# Altium PCB EtherWiz3K4KNic.PcbDoc (part 1 of 2)
Units mm, origin at the board's own origin, x right, y up, seen from the top; angles counter-clockwise.
Board outline 99.29 x 46.58 mm, 4 copper layers (Top Layer, GND, 5V, Bottom Layer), stack 1.582 mm thick; 69 components, 129 nets, 421 pads, 204 vias.
Unrouted connection lines stored in the file: 3.
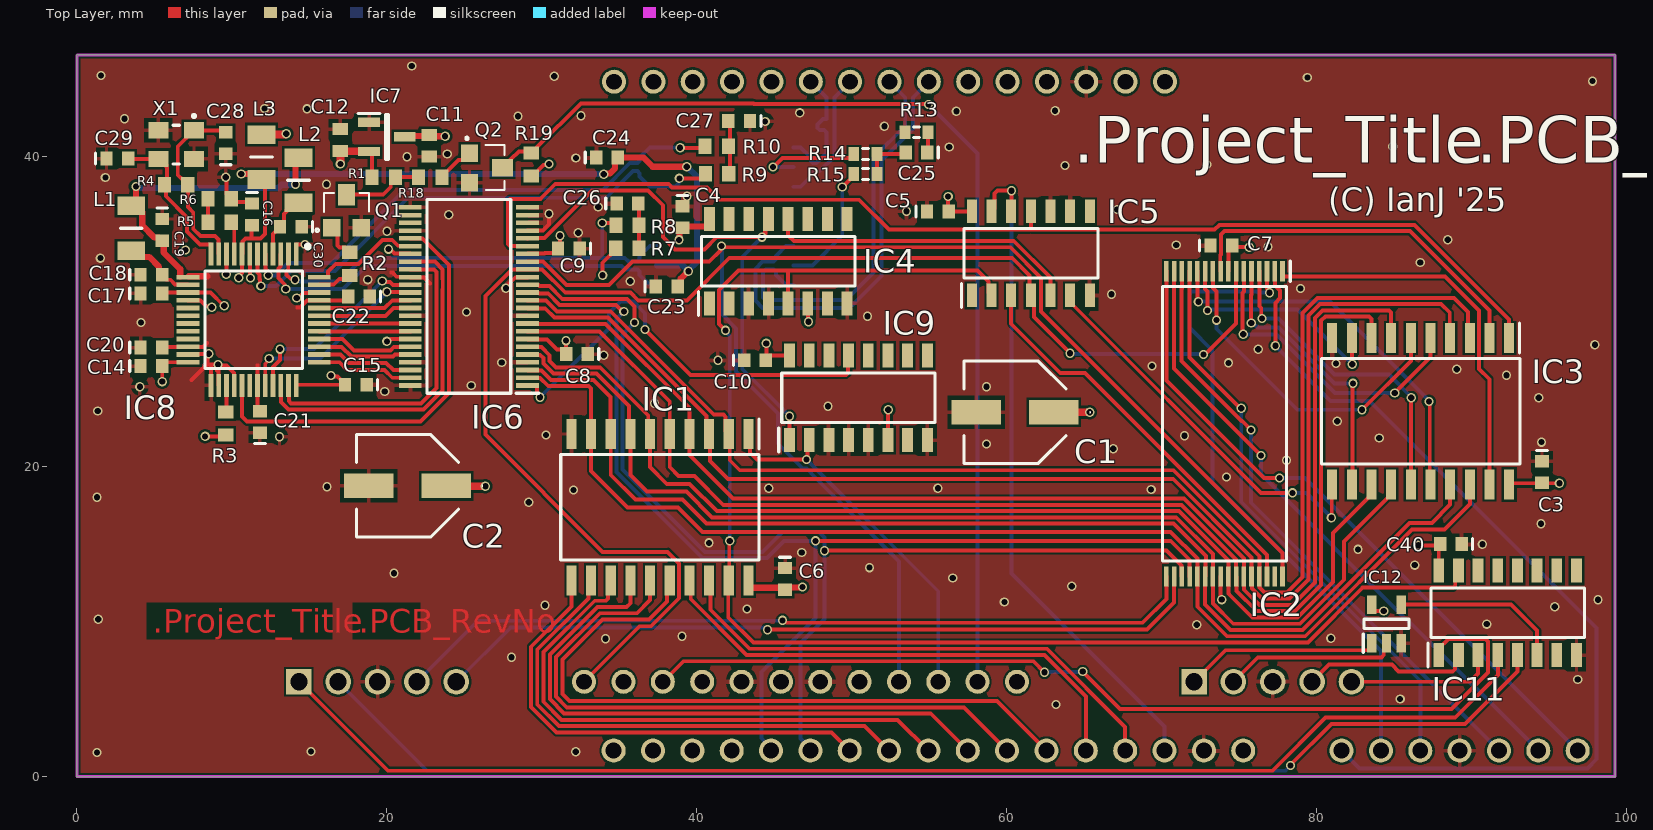
[diagram p0: Top Layer view]
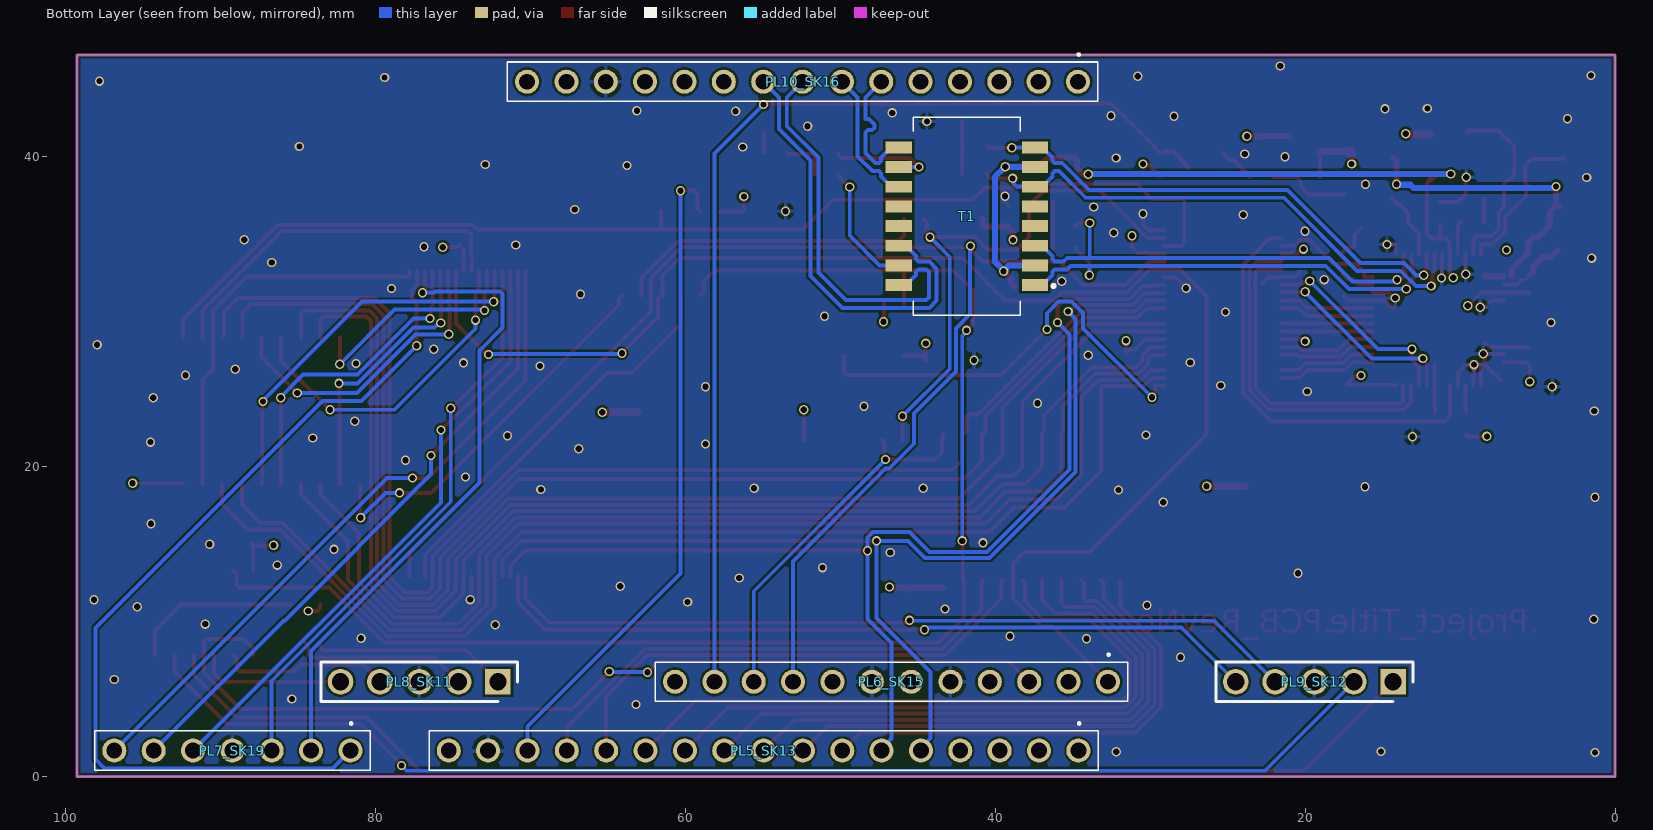
[diagram p1: Bottom Layer view, seen from below]
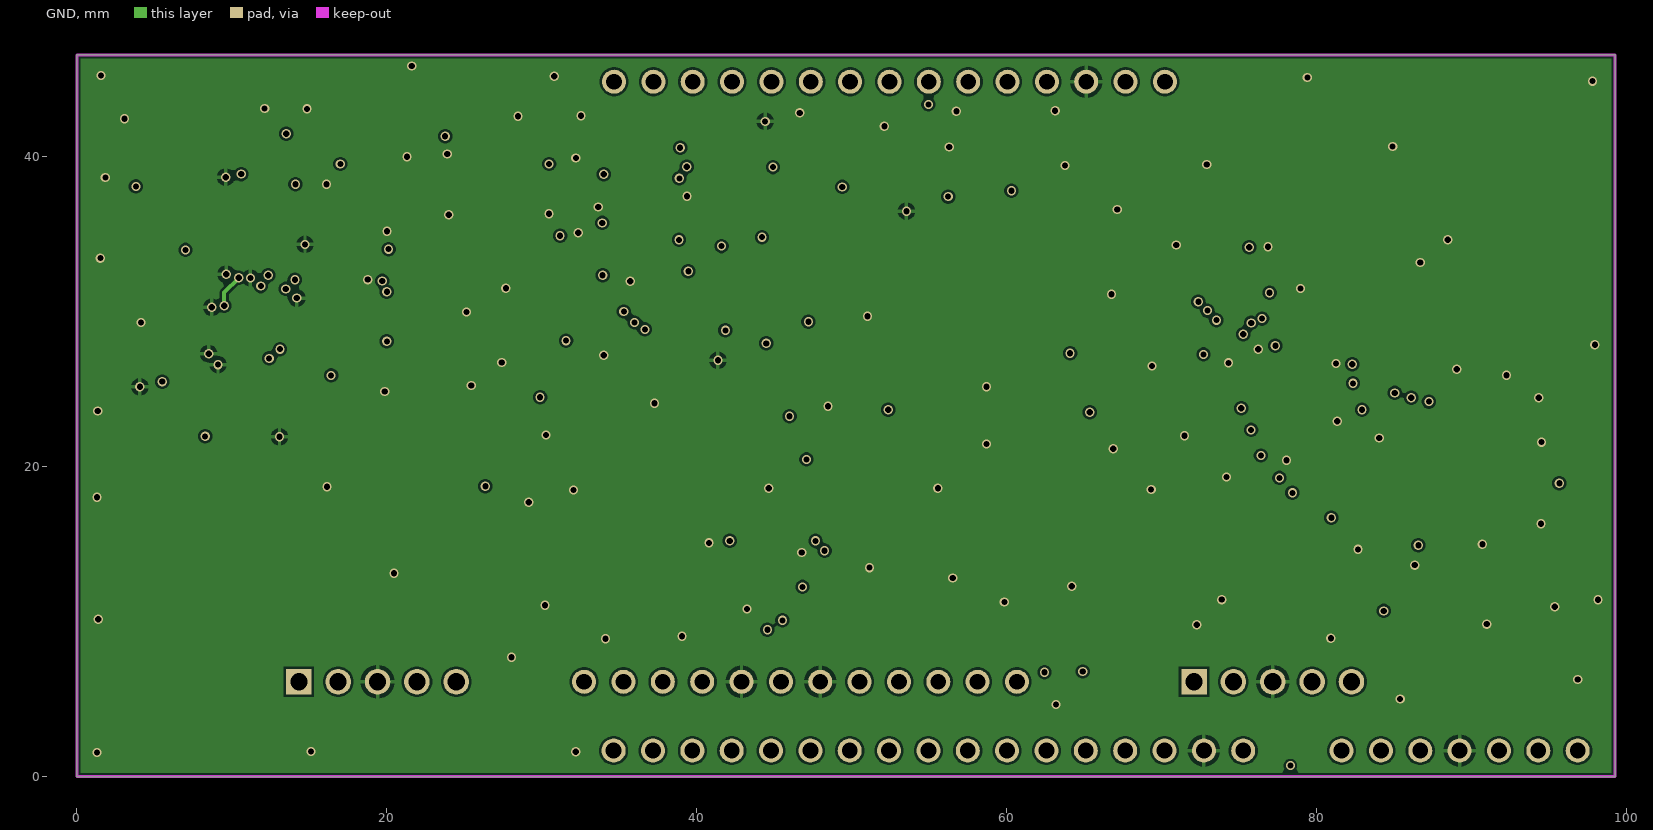
[diagram p2: GND]
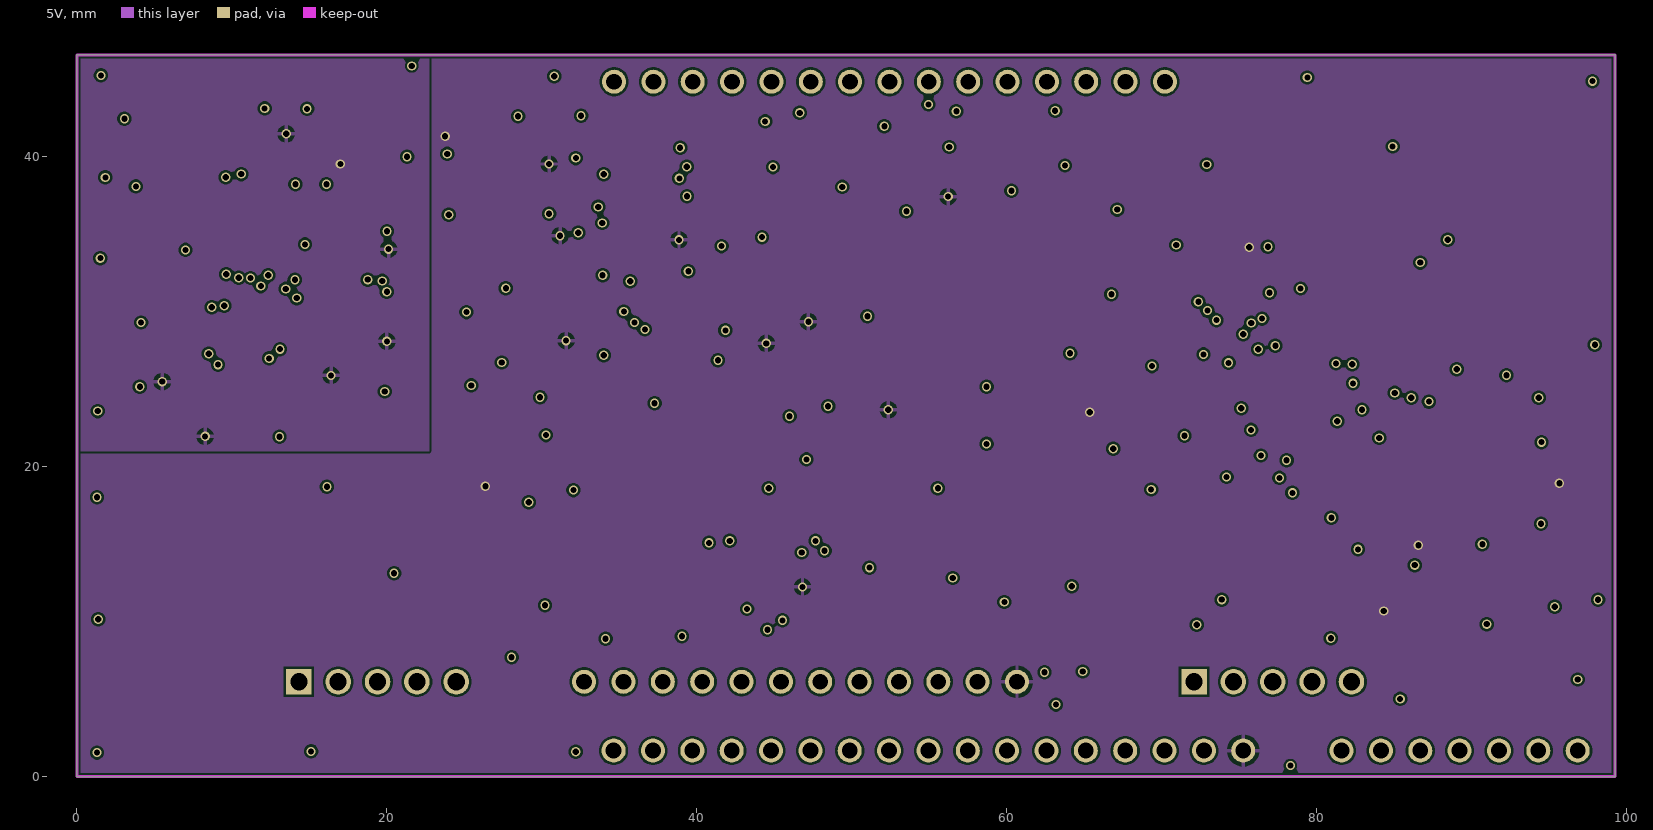
[diagram p3: 5V]
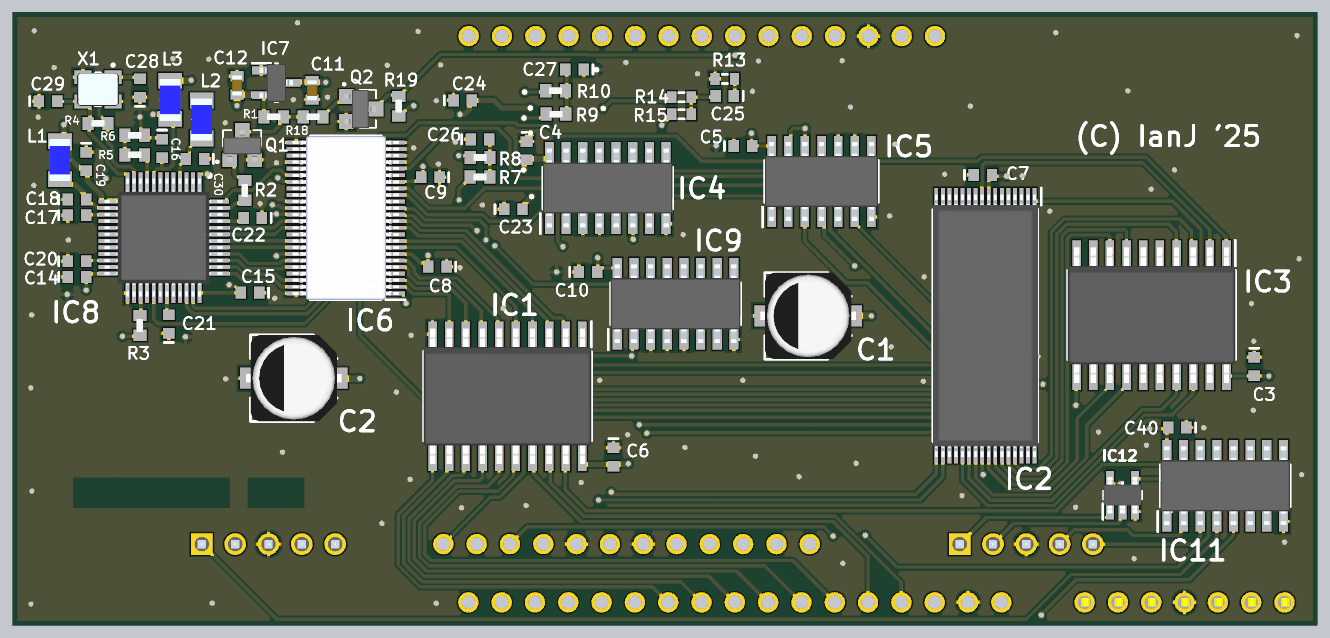
[diagram p5: 3D render of the assembled board from above, using the file's embedded part models]
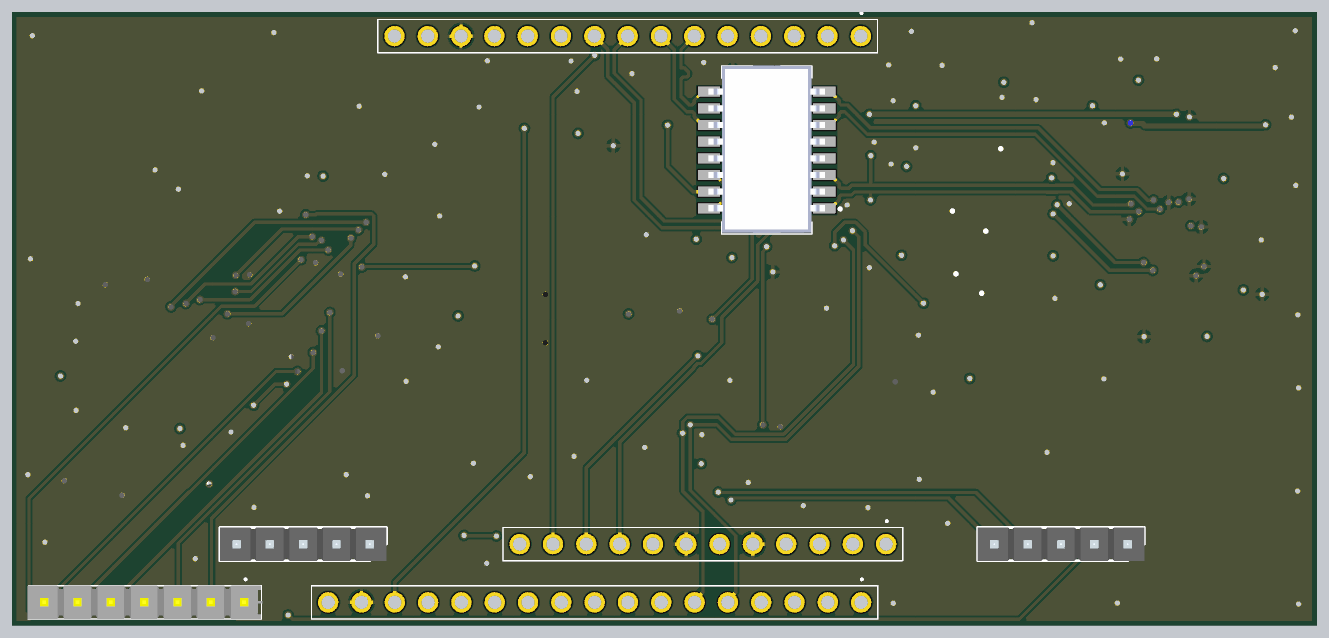
[diagram p6: 3D render of the assembled board from below, using the file's embedded part models]

## Layer stack, top to bottom
Top Solder: solder mask 0.0102, Solder Resist, Dk 3.5
Top Layer: signal copper 0.0356
Dielectric 1: prepreg 0.0711, PP-006, Dk 4.1
GND: signal copper 0.035
Dielectric 2: prepreg 1.05, PP-006, Dk 4.1
5V: signal copper 0.035
Dielectric2: dielectric 0.32, FR-4, Dk 4.8
Bottom Layer: signal copper 0.0356
Bottom Solder: solder mask 0.0102, Solder Resist, Dk 3.5

## Board outline
0,0 99.289,0 99.289,46.584 0,46.584

## Design rules (kind name [scope] priority, off if disabled: settings)
Clearance [All] p1: gap=0.15 ignorepadtopadclearanceinfootprint=FALSE
DiffPairsRouting [All] p1: maxlimit=0.254 minlimit=0.254 mostfreqgap=0.254 toplayer_minwidth=0.254 toplayer_maxwidth=0.381 toplayer_prefwidth=0.254 midlayer1_minwidth=0.254 midlayer1_maxwidth=0.381 midlayer1_prefwidth=0.254 midlayer2_minwidth=0.254 midlayer2_maxwidth=0.381 midlayer2_prefwidth=0.254 bottomlayer_minwidth=0.254 bottomlayer_maxwidth=0.381 bottomlayer_prefwidth=0.254 maxuncoupledlength=12.7
PolygonConnect [All] p1: connectstyle=Relief reliefconductorwidth=0.254 reliefentries=4 polygonreliefangle="90 Angle" airgapwidth=0.254
RoutingVias [All] p1: holewidth=0.711 width=1.27 viastyle="Through Hole" minholewidth=0.711 minwidth=1.27 maxholewidth=0.711 maxwidth=1.27
SolderMaskExpansion [All] p1: expansion=0.102 istentingtop=FALSE
SupplyNets "Schematic Supply Nets_3" [InNet('GND')] p1: voltage=0.000
SupplyNets "Schematic Supply Nets_9" [InNet('12V')] p2: voltage=0.000
SupplyNets "Schematic Supply Nets_8" [InNet('1v2d')] p3: voltage=0.000
SupplyNets "Schematic Supply Nets_7" [InNet('3v3a')] p4: voltage=0.000
SupplyNets "Schematic Supply Nets_6" [InNet('-5V')] p5: voltage=0.000
SupplyNets "Schematic Supply Nets_5" [InNet('1v2o')] p6: voltage=0.000
SupplyNets "Schematic Supply Nets_4" [InNet('GND_CHASS')] p7: voltage=0.000
SupplyNets "Schematic Supply Nets_2" [InNet('1v2a')] p8: voltage=0.000
SupplyNets "Schematic Supply Nets_1" [InNet('3v3')] p9: voltage=0.000
SupplyNets "Schematic Supply Nets" [InNet('5V')] p10: voltage=0.000
Width [All] p1: maxlimit=0.254 minlimit=0.254 preferedwidth=0.254
29 further rules are at their usual default settings.

## Classes and differential pairs
component class EtherWiz_Sockets: C40 IC11 IC12 PL1 PL2 PL3 PL4 PL5_SK13 PL6_SK15 PL7_SK19 PL8_SK11 PL9_SK12 PL10_SK16
component class EtherWiz: C1 C2 C3 C4 C5 C6 C7 C8 C9 C10 C11 C12 C14 C15 C16 C17 C18 C19 C20 C21 C22 C23 C24 C25 C26 C27 C28 C29 C30 IC1 IC2 IC3 IC4 IC5 IC6 IC7 IC8 IC9 L1 L2 L3 Q1 Q2 R1 R2 R3 R4 R5 R6 R7 R8 R9 R10 R13 R14 R15 R18 R19 T1 X1
differential pair TX: +TX_P -TX_N
differential pair RX: +RX_P -RX_N
differential pair ETX: +ETX_P -ETX_N
differential pair ERX: +ERX_P -ERX_N

## Components (designator, comment, footprint, x,y, rotation, side; value= is the part's Value field where it differs from the comment)
C1 "EEE-HA1C470AP" EEE1AA101SP 60.554,23.52 r180 top
C2 "EEE-HA1C470AP" EEE1AA101SP 21.336,18.771 r180 top
C3 "100n" CAPC1608L 94.575,19.659 r270 top
C4 "100n" CAPC1608L 39.091,36.119 r270 top
C5 "100n" CAPC1608L 55.575,36.474 r0 top
C6 "100n" CAPC1608L 45.712,12.762 r270 top
C7 "100n" CAPC1608L 73.875,34.274 r0 top
C8 "100n" CAPC1608L 32.283,27.28 r180 top
C9 "100n" CAPC1608L 31.75,34.087 r180 top
C10 "100n" CAPC1608L 43.775,26.874 r0 top
C11 "1uF" CAPC1608X90N 22.734,40.724 r90 top
C12 "1uF" CAPC1608X90N 17.006,41.094 r270 top
C14 "100n" CAPC1608L 4.806,26.494 r0 top
C15 "100n" CAPC1608L 18.006,25.294 r180 top
C16 "100n" CAPC1608L 11.306,36.294 r270 top
C17 "100n" CAPC1608L 4.806,31.194 r0 top
C18 "100nF" CAPC1608L 4.806,32.394 r0 top
C19 "100nF" CAPC1608L 5.506,35.294 r270 top
C20 "100nF" CAPC1608L 4.806,27.694 r0 top
C21 "100nF" CAPC1608L 11.806,22.894 r90 top
C22 "100nF" CAPC1608L 18.206,30.994 r180 top
C23 "100nF" CAPC1608L 38.075,31.648 r0 top
C24 "100nF" CAPC1608L 34.214,39.954 r0 top
C25 "1nF" CAPC1608L 54.198,40.292 r180 top
C26 "100nF" CAPC1608L 35.535,36.982 r0 top
C27 "100nF" CAPC1608L 42.748,42.316 r180 top
C28 "24pF" CAPC1608L 9.606,40.894 r90 top
C29 "24pF" CAPC1608L 2.606,39.894 r0 top
C30 "100nF" CAPC1608L 13.806,35.494 r180 top
C40 "100n" CAPC1608L 88.697,15.011 r180 top
IC1 "SN74HCT245DWR" SOIC127P1030X265-20N 37.633,17.388 r270 top
IC2 "MX29F040CTI-70G" SOP50P2000X120-32N 74.075,22.774 r270 top locked
IC3 "SN74HCT273DWR" SOIC127P1030X265-20N 86.74,23.584 r270 top locked
IC4 "74HCT138D,653" SOIC127P600X175-16N 45.275,33.274 r90 top locked
IC5 "74HCT32D" SOIC127P600X175-14N 61.575,33.774 r90 top locked
IC6 "74ALVC164245DGG_11" SOP50P810X120-48N 25.306,30.994 r180 top
IC7 "MCP1703AT-3302E_CB" SOT95P255X145-3N 20.006,41.294 r0 top
IC8 "W6100L" QFP50P900X900X160-48N 11.406,29.494 r270 top
IC9 "CD74HCT238M96" SOIC127P600X175-16N 50.45,24.449 r90 top locked
IC11 "74HCT138D,653" SOIC127P600X175-16N 92.354,10.566 r90 top
IC12 "SN74LVC1G08QDBVRQ1" SOT95P280X145-5N 84.531,9.855 r90 top
L1 "782763800" INDC3216X130N 3.506,35.394 r90 top
L2 "782763800" INDC3216X130N 14.306,38.494 r270 top
L3 "782763800" INDC3216X130N 11.906,39.994 r270 top
PL5_SK13 "EW-17-12-G-S-550" TSW-117-XX-YY-S 34.646,1.676 r0 bottom locked
PL6_SK15 "TSW-112-05-G-S" TSW-112-XX-YY-S 32.741,6.121 r0 bottom locked
PL7_SK19 "TSW-107-05-G-S" TSW-107-XX-YY-S 81.636,1.676 r0 bottom locked
PL8_SK11 "TSW-105-05-G-S-LL" HDRV5W64P0X254_1X5_1270X254X521P 72.111,6.121 r180 bottom locked
PL9_SK12 "TSW-105-05-G-S-LL" HDRV5W64P0X254_1X5_1270X254X521P 14.326,6.121 r180 bottom locked
PL10_SK16 "TSW-115-05-G-S" TSW-115-XX-YY-S 34.671,44.856 r0 bottom locked
Q1 "BC846" SOT-23 17.406,36.494 r0 top
Q2 "BC846" SOT-23 26.406,39.294 r270 top
R1 "100K" RESC1608X50N 19.806,38.694 r180 top
R2 "2K2" RESC1608X50N 17.606,33.094 r90 top
R3 "2K2" RESC1608X50N 9.606,22.794 r270 top
R4 "1M" RESC1608X50N 6.406,38.194 r0 top
R5 "12K" RESC1608X50N 9.206,35.794 r0 top
R6 "300R" RESC1608X50N 9.206,37.294 r180 top
R7 "50R" RESC1608X50N 35.535,34.112 r180 top
R8 "50R" RESC1608X50N 35.539,35.598 r180 top
R9 "50R" RESC1608X50N 41.326,38.913 r180 top
R10 "50R" RESC1608X50N 41.3,40.691 r180 top
R13 "0R" RESC1608L 54.198,41.592 r0 top
R14 "75R" RESC1608L 50.898,40.192 r180 top
R15 "75R" RESC1608L 50.898,38.892 r180 top
R18 "2K2" RESC1608X50N 22.806,38.694 r0 top
R19 "100K" RESC1608X50N 29.335,39.512 r270 top
T1 "PT61017PEL" PT61017PEL 41.199,36.17 r90 bottom locked
X1 "25MHz" ABM810000MHZ12D2W 6.406,40.794 r180 top

## Footprints (in the part's own frame and the unit in brackets; to place one, negate y for a bottom-side part, rotate by r counter-clockwise, add the part's x,y. Pads: shape width x height; smd on the part's side, far side on the other; paste and mask are expansions set on the pad)
ABM810000MHZ12D2W [mm]
  rect 1.3x1.05 smd: 1(-1.15,-0.925) 2(1.15,-0.925) 3(1.15,0.925) 4(-1.15,0.925)
  silkscreen extent -1.25,-1.95 0.2,1.25, body extent -1.6,-1.25 1.6,1.25, height 0.8
CAPC1608L [mm] "Chip Capacitor, Body 1.6x0.8mm, IPC High Density"
  rect 0.8x0.9 smd: 1(-0.7,0) 2(0.7,0)
  silkscreen extent -1.4,-0.35 -1.4,0.35, body extent -0.87,-0.48 0.87,0.48, height 0.85
CAPC1608X90N [mm]
  rect 0.78x0.99 smd: 1(-0.7,0) 2(0.7,0)
  body extent -0.8,-0.41 0.8,0.41, height 0.9
EEE1AA101SP [mm]
  rect 3.2x1.6 smd: 1(-2.5,0) 2(2.5,0)
  silkscreen extent -4.88,-3.3 3.3,3.3, body extent 0,0 0,0
HDRV5W64P0X254_1X5_1270X254X521P [mm]
  rect 1.65x1.65 hole 1.1: 1(0,0)
  round 1.65 hole 1.1: 2(-2.54,0) 3(-5.08,0) 4(-7.62,0) 5(-10.16,0)
  silkscreen extent -11.43,-1.27 1.27,1.27, body extent -11.43,-1.27 1.27,1.27, height 5.21
INDC3216X130N [mm]
  rect 1.2x1.8 smd: 1(-1.45,0) 2(1.45,0)
  silkscreen extent 0,-0.7 0,0.7, body extent -1.6,-0.8 1.6,0.8, height 1.3
PT61017PEL [mm]
  rect 0.76x1.7 smd: 1(-4.445,-3.75) 2(-3.175,-3.75) 3(-1.905,-3.75) 4(-0.635,-3.75) 5(0.635,-3.75) 6(1.905,-3.75) 7(3.175,-3.75) 8(4.445,-3.75) 9(4.445,5.05) 10(3.175,5.05) 11(1.905,5.05) 12(0.635,5.05) 13(-0.635,5.05) 14(-1.905,5.05) 15(-3.175,5.05) 16(-4.445,5.05)
  silkscreen extent -6.4,-5.05 6.4,4.1, body extent -6.33,-3.8 6.45,5.1, height 5.14
QFP50P900X900X160-48N [mm]
  rect 1.475x0.3 smd: 1(-4.238,2.75) 2(-4.238,2.25) 3(-4.238,1.75) 4(-4.238,1.25) 5(-4.238,0.75) 6(-4.238,0.25) 7(-4.238,-0.25) 8(-4.238,-0.75) 9(-4.238,-1.25) 10(-4.238,-1.75) 11(-4.238,-2.25) 12(-4.238,-2.75) 25(4.238,-2.75) 26(4.238,-2.25) 27(4.238,-1.75) 28(4.238,-1.25) 29(4.238,-0.75) 30(4.238,-0.25) 31(4.238,0.25) 32(4.238,0.75) 33(4.238,1.25) 34(4.238,1.75) 35(4.238,2.25) 36(4.238,2.75)
  rect 0.3x1.475 smd: 13(-2.75,-4.238) 14(-2.25,-4.238) 15(-1.75,-4.238) 16(-1.25,-4.238) 17(-0.75,-4.238) 18(-0.25,-4.238) 19(0.25,-4.238) 20(0.75,-4.238) 21(1.25,-4.238) 22(1.75,-4.238) 23(2.25,-4.238) 24(2.75,-4.238) 37(2.75,4.238) 38(2.25,4.238) 39(1.75,4.238) 40(1.25,4.238) 41(0.75,4.238) 42(0.25,4.238) 43(-0.25,4.238) 44(-0.75,4.238) 45(-1.25,4.238) 46(-1.75,4.238) 47(-2.25,4.238) 48(-2.75,4.238)
  silkscreen extent -4.85,-3.15 3.15,3.63, body extent -4.5,-4.5 4.5,4.5, height 1.6
RESC1608L [mm] "Chip Resistor, Body 1.6x0.8mm, IPC High Density"
  rect 0.7x0.9 smd: 1(-0.75,0) 2(0.75,0)
  silkscreen extent -0.2,-0.35 0.2,0.35, body extent -0.8,-0.41 0.8,0.41, height 0.45
RESC1608X50N [mm]
  rect 0.85x1 smd: 1(-0.75,0) 2(0.75,0)
  body extent -0.5,-0.25 0.5,0.25, height 0.35
SOIC127P600X175-14N [mm]
  rect 1.525x0.65 smd: 1(-2.712,3.81) 2(-2.712,2.54) 3(-2.712,1.27) 4(-2.712,0) 5(-2.712,-1.27) 6(-2.712,-2.54) 7(-2.712,-3.81) 8(2.712,-3.81) 9(2.712,-2.54) 10(2.712,-1.27) 11(2.712,0) 12(2.712,1.27) 13(2.712,2.54) 14(2.712,3.81)
  silkscreen extent -3.47,-4.33 1.6,4.48, body extent -3,-4.33 3,4.33, height 1.75
SOIC127P600X175-16N [mm]
  rect 1.55x0.7 smd: 1(-2.725,4.445) 2(-2.725,3.175) 3(-2.725,1.905) 4(-2.725,0.635) 5(-2.725,-0.635) 6(-2.725,-1.905) 7(-2.725,-3.175) 8(-2.725,-4.445) 9(2.725,-4.445) 10(2.725,-3.175) 11(2.725,-1.905) 12(2.725,-0.635) 13(2.725,0.635) 14(2.725,1.905) 15(2.725,3.175) 16(2.725,4.445)
  silkscreen extent -3.5,-4.95 1.6,5.15, body extent -3,-4.95 3,4.95, height 1.75
SOIC127P1030X265-20N [mm]
  rect 1.95x0.65 smd: 1(-4.725,5.715) 2(-4.725,4.445) 3(-4.725,3.175) 4(-4.725,1.905) 5(-4.725,0.635) 6(-4.725,-0.635) 7(-4.725,-1.905) 8(-4.725,-3.175) 9(-4.725,-4.445) 10(-4.725,-5.715) 11(4.725,-5.715) 12(4.725,-4.445) 13(4.725,-3.175) 14(4.725,-1.905) 15(4.725,-0.635) 16(4.725,0.635) 17(4.725,1.905) 18(4.725,3.175) 19(4.725,4.445) 20(4.725,5.715)
  silkscreen extent -5.7,-6.4 3.4,6.4, body extent -5.16,-6.4 5.16,6.4, height 1.75
SOP50P810X120-48N [mm]
  rect 1.475x0.3 smd: 1(-3.788,5.75) 2(-3.788,5.25) 3(-3.788,4.75) 4(-3.788,4.25) 5(-3.788,3.75) 6(-3.788,3.25) 7(-3.788,2.75) 8(-3.788,2.25) 9(-3.788,1.75) 10(-3.788,1.25) 11(-3.788,0.75) 12(-3.788,0.25) 13(-3.788,-0.25) 14(-3.788,-0.75) 15(-3.788,-1.25) 16(-3.788,-1.75) 17(-3.788,-2.25) 18(-3.788,-2.75) 19(-3.788,-3.25) 20(-3.788,-3.75) 21(-3.788,-4.25) 22(-3.788,-4.75) 23(-3.788,-5.25) 24(-3.788,-5.75) 25(3.788,-5.75) 26(3.788,-5.25) 27(3.788,-4.75) 28(3.788,-4.25) 29(3.788,-3.75) 30(3.788,-3.25) 31(3.788,-2.75) 32(3.788,-2.25) 33(3.788,-1.75) 34(3.788,-1.25) 35(3.788,-0.75) 36(3.788,-0.25) 37(3.788,0.25) 38(3.788,0.75) 39(3.788,1.25) 40(3.788,1.75) 41(3.788,2.25) 42(3.788,2.75) 43(3.788,3.25) 44(3.788,3.75) 45(3.788,4.25) 46(3.788,4.75) 47(3.788,5.25) 48(3.788,5.75)
  silkscreen extent -4.52,-6.25 2.7,6.25, body extent -4.06,-6.25 4.06,6.25, height 1
SOP50P2000X120-32N [mm]
  rect 1.3x0.3 smd: 1(-9.85,3.75) 2(-9.85,3.25) 3(-9.85,2.75) 4(-9.85,2.25) 5(-9.85,1.75) 6(-9.85,1.25) 7(-9.85,0.75) 8(-9.85,0.25) 9(-9.85,-0.25) 10(-9.85,-0.75) 11(-9.85,-1.25) 12(-9.85,-1.75) 13(-9.85,-2.25) 14(-9.85,-2.75) 15(-9.85,-3.25) 16(-9.85,-3.75) 17(9.85,-3.75) 18(9.85,-3.25) 19(9.85,-2.75) 20(9.85,-2.25) 21(9.85,-1.75) 22(9.85,-1.25) 23(9.85,-0.75) 24(9.85,-0.25) 25(9.85,0.25) 26(9.85,0.75) 27(9.85,1.25) 28(9.85,1.75) 29(9.85,2.25) 30(9.85,2.75) 31(9.85,3.25) 32(9.85,3.75)
  silkscreen extent -10.5,-4 8.85,4.25, body extent -10,-4 10,4, height 1.2
SOT95P255X145-3N [mm]
  rect 1.4x0.6 smd: 1(-1.15,0.95) 2(-1.15,-0.95) 3(1.15,0)
  silkscreen extent -1.85,-1.45 0.1,1.5, body extent -1.28,-1.45 1.28,1.45, height 1.45
SOT95P280X145-5N [mm]
  rect 1.2x0.6 smd: 1(-1.25,0.95) 2(-1.25,0) 3(-1.25,-0.95) 4(1.25,-0.95) 5(1.25,0.95)
  silkscreen extent -1.85,-1.45 0.3,1.5, body extent -1.4,-1.45 1.4,1.45, height 1.2
SOT-23 [mil]
  rect 44x44 smd: 1(-37.5,-42) 2(37.5,-42)
  rect 44x54 smd: 3(-0.25,42)
  silkscreen extent -79,-52 57,47, body extent -57,-47 57,47, height 40
TSW-107-XX-YY-S [mm]
  round 1.55 hole 1.02: 1(0,0) 2(2.54,0) 3(5.08,0) 4(7.62,0) 5(10.16,0) 6(12.7,0) 7(15.24,0)
  silkscreen extent -1.27,-1.8 16.51,1.27, body extent -1.34,-1.29 16.57,1.25, height 9.97
TSW-112-XX-YY-S [mm]
  round 1.55 hole 1.02: 1(0,0) 2(2.54,0) 3(5.08,0) 4(7.62,0) 5(10.16,0) 6(12.7,0) 7(15.24,0) 8(17.78,0) 9(20.32,0) 10(22.86,0) 11(25.4,0) 12(27.94,0)
  silkscreen extent -1.27,-1.8 29.21,1.27
TSW-115-XX-YY-S [mm]
  round 1.55 hole 1.02: 1(0,0) 2(2.54,0) 3(5.08,0) 4(7.62,0) 5(10.16,0) 6(12.7,0) 7(15.24,0) 8(17.78,0) 9(20.32,0) 10(22.86,0) 11(25.4,0) 12(27.94,0) 13(30.48,0) 14(33.02,0) 15(35.56,0)
  silkscreen extent -1.27,-1.8 36.83,1.27
TSW-117-XX-YY-S [mm]
  round 1.55 hole 1.02: 1(0,0) 2(2.54,0) 3(5.08,0) 4(7.62,0) 5(10.16,0) 6(12.7,0) 7(15.24,0) 8(17.78,0) 9(20.32,0) 10(22.86,0) 11(25.4,0) 12(27.94,0) 13(30.48,0) 14(33.02,0) 15(35.56,0) 16(38.1,0) 17(40.64,0)
  silkscreen extent -1.27,-1.8 41.91,1.27

## Part data
C1 C2: "Capacitor Polarised", Manufacturer_Name=Panasonic, Mouser Part Number=667-EEE-HA1C470AP, Arrow Part Number=EEE-HA1C470AP, Arrow Price/Stock=https://www.arrow.com/en/products/eeeha1c470ap/panasonic?utm_currency=USD&region=europe, Datasheet Link=http://industrial.panasonic.com/cdbs/www-data/pdf/RDE0000/ABA0000C1148.pdf, Height=7.8mm, Manufacturer_Part_Number=EEE-HA1C470AP, Mouser Price/Stock=https://www.mouser.co.uk/ProductDetail/Panasonic/EEE-HA1C470AP?qs=d1CqaRUMZD%2FL5qU1hDRerg%3D%3D
C3 C4 C5 C6 C7 C8 C9 C10 C14 C15 C16 C17 C40: library part CAP_100n_0603_50V_0, "CAP 100nF, 0603, 50V, X7R, 10%", Distributor1 Part No=CL10B104KB8NNNC, Distributor2 Part No=311-1344-2-ND, Manufacturer1=Samsung, Manufacturer2=Yageo, Voltage=50V, ComponentLink1Description=ComponentLinknURL1, ComponentLink1URL=https://media.digikey.com/pdf/Data%20Sheets/Samsung%20PDFs/CL_Series_MLCC_ds.pdf, ComponentLink2Description=ComponentLinknURL2, ComponentLink2URL=https://www.yageo.com/upload/media/product/productsearch/datasheet/mlcc/UPY-GPHC_X7R_6.3V-to-50V_18.pdf, Distributor1=Anglia, Distributor2=Digikey, ManuPart1=CL10B104KB8NNNC, ManuPart2=CC0603KRX7R9BB104
C11 C12: library part CL10A105KP8NNNC, "Capacitor", Manufacturer_Name=SAMSUNG, Mouser Part Number=187-CL10A105KP8NNNC, Arrow Part Number=CL10A105KP8NNNC, Arrow Price/Stock=https://www.arrow.com/en/products/cl10a105kp8nnnc/samsung-electro-mechanics?utm_currency=USD&region=nac, Datasheet Link=https://datasheet.lcsc.com/szlcsc/Samsung-Electro-Mechanics-CL10A105KP8NNNC_C26413.pdf, Height=0.9mm, Manufacturer_Part_Number=CL10A105KP8NNNC, Mouser Price/Stock=https://www.mouser.co.uk/ProductDetail/Samsung-Electro-Mechanics/CL10A105KP8NNNC?qs=349EhDEZ59qtu6tL%2F73n2A%3D%3D
C18 C19 C20 C21 C22 C30: library part 100nF0805, "Capacitor", Arrow Part Number=C2012X7R1H104K125AM, LCSC Part #=C111492, Manufacturer_Name=TDK, Mouser Part Number=810-C2012X7R1H104KT5, Arrow Price/Stock=https://www.arrow.com/en/products/c2012x7r1h104k125am/tdk, Datasheet Link=https://product.tdk.com/info/en/catalog/datasheets/mlcc_commercial_midvoltage_en.pdf, Height=1.45mm, Manufacturer_Part_Number=C2012X7R1H104K125AM, Mouser Price/Stock=https://www.mouser.com/Search/Refine.aspx?Keyword=810-C2012X7R1H104KT5
C23 C24 C26 C27: library part 909-0001-L, "Cap ceramic X7R/X5R 100nF 10% 16V C0603", Disti Part Number=432-210, LCSC Part #=C66501, Manufacturer=EPCOS, Tolerance=0.1, Voltage=16V, Component Type=Standard, Construction=X7R, Cost(£)=0.038, Distributer=Farnell, ManuPart=B37931-K9104-K60, Qualified2ndManu=Yageo, Qualified2ndPart=CC0603KRX7R7BB104, RoHS Compliant=YES
C25: library part 910-0053-L, "Cap ceramic X7R 1nF 10% 2kV C1206", Disti Part Number=1206GC102KAT1A, LCSC Part #=C23631, Manufacturer=AVX, Tolerance=0.1, Voltage=2000V, Component Type=Standard, Construction=X7R, Cost(£)=0.187, Distributer=Anglia, ManuPart=1206GC102KAT1A, RoHS Compliant=YES
C28 C29: library part CAP_10P_0603_50V_0, "CAP 10PF, 0603, 50V, NP0, 10%"
IC1: "Integrated Circuit", Manufacturer_Name="Texas Instruments", Mouser Part Number=595-SN74HCT245DWR, Arrow Part Number=SN74HCT245DWR, Arrow Price/Stock=https://www.arrow.com/en/products/sn74hct245dwr/texas-instruments?region=nac, Datasheet Link=https://datasheet.datasheetarchive.com/originals/distributors/SFDatasheet-6/sf-000131457.pdf, Height=2.65mm, Manufacturer_Part_Number=SN74HCT245DWR, Mouser Price/Stock=https://www.mouser.co.uk/ProductDetail/Texas-Instruments/SN74HCT245DWR?qs=st7IWvlL5%2FhHLMwvvkYTgw%3D%3D
IC2: "Integrated Circuit", Manufacturer_Name=Macronix, Arrow Part Number=MX29F040CTI-70G, Arrow Price/Stock=https://www.arrow.com/en/products/mx29f040cti-70g/macronix-international?region=nac, Datasheet Link=https://www.macronix.com/Lists/Datasheet/Attachments/7266/MX29F040C,%205V,%204Mb,%20v2.2.pdf, Height=1.2mm, Manufacturer_Part_Number=MX29F040CTI-70G
IC3: "Integrated Circuit", Manufacturer_Name="Texas Instruments", Mouser Part Number=595-SN74HCT273DWR, Arrow Part Number=SN74HCT273DWR, Arrow Price/Stock=https://www.arrow.com/en/products/sn74hct273dwr/texas-instruments, Datasheet Link=https://datasheet.datasheetarchive.com/originals/distributors/Datasheets-36/DSA-718641.pdf, Height=2.65mm, Manufacturer_Part_Number=SN74HCT273DWR, Mouser Price/Stock=https://www.mouser.co.uk/ProductDetail/Texas-Instruments/SN74HCT273DWR?qs=SL3LIuy2dWww%2FZr6up0MdA%3D%3D
IC4 IC11: "Integrated Circuit", Manufacturer_Name=Nexperia, Mouser Part Number=771-74HCT138D-T, Arrow Part Number=74HCT138D,653, Arrow Price/Stock=https://www.arrow.com/en/products/74hct138d653/nexperia?region=nac, Datasheet Link=https://assets.nexperia.com/documents/data-sheet/74HC_HCT138.pdf, Height=1.75mm, Manufacturer_Part_Number=74HCT138D,653, Mouser Price/Stock=https://www.mouser.co.uk/ProductDetail/Nexperia/74HCT138D653?qs=P62ublwmbi8MKahyK7iY6g%3D%3D
IC5: "Integrated Circuit", Manufacturer_Name=Toshiba, Mouser Part Number=N/A, Arrow Part Number=74HCT32D, Arrow Price/Stock=https://www.arrow.com/en/products/74hct32d/toshiba?region=nac, Datasheet Link=https://toshiba.semicon-storage.com/info/docget.jsp?did=37176&prodName=74HCT32D, Height=1.75mm, Manufacturer_Part_Number=74HCT32D, Mouser Price/Stock=https://www.mouser.co.uk/ProductDetail/Toshiba/74HCT32D?qs=j%252B1pi9TdxUZqVZos7uP1Yw%3D%3D
IC6: "Integrated Circuit", Arrow Part Number=74ALVC164245DGG:11, Manufacturer_Name=Nexperia, Mouser Part Number=771-74ALVC164245, Arrow Price/Stock=https://www.arrow.com/en/products/74alvc164245dgg11/nexperia?utm_currency=USD&region=nac, Datasheet Link=https://assets.nexperia.com/documents/data-sheet/74ALVC164245.pdf, Height=1.2mm, Manufacturer_Part_Number=74ALVC164245DGG:11, Mouser Price/Stock=https://www.mouser.co.uk/ProductDetail/Nexperia/74ALVC164245DGG11?qs=odJ8N4Y39o4j0ykFPcnqaQ%3D%3D
IC7: "Integrated Circuit", Arrow Part Number=MCP1703AT-3302E/CB, Manufacturer_Name=Microchip, Mouser Part Number=579-MCP1703AT3302ECB, Arrow Price/Stock=https://www.arrow.com/en/products/mcp1703at-3302ecb/microchip-technology?region=nac, Datasheet Link=http://uk.rs-online.com/web/p/products/7709509, Height=1.45mm, Manufacturer_Part_Number=MCP1703AT-3302E/CB, Mouser Price/Stock=https://www.mouser.co.uk/ProductDetail/Microchip-Technology/MCP1703AT-3302E-CB?qs=PZkJWYMe7leeY97bgTp%252B9w%3D%3D
IC8: "Integrated Circuit", Manufacturer_Name="WIZnet Inc", Mouser Part Number=950-W6100L, Datasheet Link=https://eu.mouser.com/datasheet/2/443/w6100_ds_v104e-1994614.pdf, Height=1.6mm, Manufacturer_Part_Number=W6100L, Mouser Price/Stock=https://www.mouser.co.uk/ProductDetail/WIZnet/W6100L?qs=pUKx8fyJudARLmbJE2EKlA%3D%3D
IC9: "Integrated Circuit", Manufacturer_Name="Texas Instruments", Mouser Part Number=595-CD74HCT238M96, Datasheet Link=http://www.ti.com/lit/gpn/cd74hct238, Height=1.75mm, Manufacturer_Part_Number=CD74HCT238M96, Mouser Price/Stock=https://www.mouser.co.uk/ProductDetail/Texas-Instruments/CD74HCT238M96?qs=xFfolx0DHx1u%2Fks4%2FbIqqQ%3D%3D
IC12: "Integrated Circuit", Manufacturer_Name="Texas Instruments", Mouser Part Number=595-SN74LVC1G08QDBQ1, Arrow Part Number=SN74LVC1G08QDBVRQ1, Arrow Price/Stock=https://www.arrow.com/en/products/sn74lvc1g08qdbvrq1/texas-instruments?utm_currency=USD&region=nac, Datasheet Link=http://www.ti.com/lit/ds/symlink/sn74lvc1g08-q1.pdf, Height=1.45mm, Manufacturer_Part_Number=SN74LVC1G08QDBVRQ1, Mouser Price/Stock=https://www.mouser.co.uk/ProductDetail/Texas-Instruments/SN74LVC1G08QDBVRQ1?qs=PVVDbbWpW3K%252BPBrUmLG6eg%3D%3D
L1 L2 L3: library part 74279215, "Inductor", Manufacturer_Name="Wurth Elektronik", Mouser Part Number=710-782763800, Datasheet Link=http://componentsearchengine.com/Datasheets/1/74279215.pdf, Height=1.3mm, Manufacturer_Part_Number=782763800, Mouser Price/Stock=https://www.mouser.co.uk/ProductDetail/Wurth-Elektronik/74279215?qs=5twSNpOB8IC%252BebnV0jQtuw%3D%3D
PL5_SK13: library part TSW-117-05-G-S, "Connector", Manufacturer_Name=SAMTEC, Datasheet Link=http://suddendocs.samtec.com/prints/tsw-xxx-xx-xxx-x-xx-xxx-mkt.pdf, Manufacturer_Part_Number=TSW-117-05-G-S
PL6_SK15 PL7_SK19 PL8_SK11 PL9_SK12 PL10_SK16: "Connector", Manufacturer_Name=SAMTEC
  PL6_SK15: Datasheet Link=http://suddendocs.samtec.com/prints/tsw-xxx-xx-xxx-x-xx-xxx-mkt.pdf, Manufacturer_Part_Number=TSW-112-05-G-S
  PL7_SK19: Datasheet Link=http://suddendocs.samtec.com/prints/tsw-xxx-xx-xxx-x-xx-xxx-mkt.pdf, Manufacturer_Part_Number=TSW-107-05-G-S
  PL8_SK11 PL9_SK12: Datasheet Link=https://componentsearchengine.com/Datasheets/2/TSW-105-05-G-S-LL.pdf, Height=5.21mm, Manufacturer_Part_Number=TSW-105-05-G-S-LL
  PL10_SK16: Datasheet Link=http://suddendocs.samtec.com/prints/tsw-xxx-xx-xxx-x-xx-xxx-mkt.pdf, Manufacturer_Part_Number=TSW-115-05-G-S
Q1 Q2: library part TRANS_NPN_BC846_0, "Transistor NPN, 65V, 100mA, TO-236AB/SOT23"
R1 R19: library part 920-0030-L, "Resistor 100K 1%  0603"
R2 R3 R18: library part 920-0030-L, "Resistor 2K2 1%  0603", Disti Part Number=2447434, LCSC Part #=C127449, Manufacturer=Multicomp, Power=63mW, Tolerance=0.01, Component Type=Standard, Construction="Thick Film", Cost(£)=0.025, Distributer=Farnell, ManuPart=MCWR06X75R0FTL, RoHS Compliant=YES
R4: library part 920-0030-L, "Resistor 1M 1%  0603", Disti Part Number=2447434, LCSC Part #=C127449, Manufacturer=Multicomp, Power=63mW, Tolerance=0.01, Component Type=Standard, Construction="Thick Film", Cost(£)=0.025, Distributer=Farnell, ManuPart=MCWR06X75R0FTL, RoHS Compliant=YES
R5: library part 920-0030-L, "Resistor 12K 1%  0603", Disti Part Number=2447434, LCSC Part #=C127449, Manufacturer=Multicomp, Power=63mW, Tolerance=0.01, Component Type=Standard, Construction="Thick Film", Cost(£)=0.025, Distributer=Farnell, ManuPart=MCWR06X75R0FTL, RoHS Compliant=YES
R6: library part 920-0030-L, "Resistor 300R 1%  0603", Disti Part Number=2447434, LCSC Part #=C127449, Manufacturer=Multicomp, Power=63mW, Tolerance=0.01, Component Type=Standard, Construction="Thick Film", Cost(£)=0.025, Distributer=Farnell, ManuPart=MCWR06X75R0FTL, RoHS Compliant=YES
R7 R8 R9 R10: library part 920-0030-L, "Resistor 50R 1%  0603", Disti Part Number=2447434, LCSC Part #=C127449, Manufacturer=Multicomp, Power=63mW, Tolerance=0.01, Component Type=Standard, Construction="Thick Film", Cost(£)=0.025, Distributer=Farnell, ManuPart=MCWR06X75R0FTL, RoHS Compliant=YES
R13: library part 920-0001-L, "Resistor 0R0 1A Max 0603", Disti Part Number=923-3130, LCSC Part #=C844718, Manufacturer=Vishay, Component Type=Standard, Construction="Thick Film", Cost(£)=0.056, Distributer=Farnell, ManuPart=CRCW06030000Z0EA, Qualified2ndManu=Yageo, Qualified2ndPart=RC0603JR-070RL, RoHS Compliant=YES
R14 R15: library part 920-0030-L, "Resistor 75R 1%  0603", Disti Part Number=2447434, LCSC Part #=C127449, Manufacturer=Multicomp, Power=63mW, Tolerance=0.01, Component Type=Standard, Construction="Thick Film", Cost(£)=0.025, Distributer=Farnell, ManuPart=MCWR06X75R0FTL, RoHS Compliant=YES
T1: "Transformer", Disti Part Number=652-PT61017PEL, LCSC Part #=C124001, Manufacturer=Bourns, Arrow Price/Stock=https://www.arrow.com/en/products/pt61017pel/bourns?region=europe, Datasheet Link=http://www.bourns.com/docs/Product-Datasheets/pt61017pel.pdf, Distributer=Mouser, Height=5mm, ManuPart=PT61017PEL, Mouser Price/Stock=https://www.mouser.co.uk/ProductDetail/Bourns/PT61017PEL?qs=0rbOLB9uh%252BASY8PB9lbWrQ%3D%3D
X1: library part ABM8-25.000MHZ-D2X-T, "Crystal or Oscillator", Manufacturer_Name=ABRACON, Mouser Part Number=815-ABM825MHZD2XT, Arrow Part Number=ABM8-25.000MHZ-D2X-T, Arrow Price/Stock=https://www.arrow.com/en/products/abm8-25.000mhz-d2x-t/abracon?region=nac, Datasheet Link=https://abracon.com/Resonators/abm8.pdf, Height=0.8mm, Manufacturer_Part_Number=ABM8-25.000MHZ-D2X-T, Mouser Price/Stock=https://www.mouser.co.uk/ProductDetail/ABRACON/ABM8-25.000MHZ-D2X-T?qs=XeJtXLiO41RuPiM7CXbPRQ%3D%3D

## Via types
v1: diameter 0.6, hole 0.4, Top Layer to Bottom Layer, tented both sides, 204 vias

## Nets (pads, with @x,y where several pads share a name; then routed paths per layer and width w, separated by ;. In a path a pad name is that pad's centre, name@x,y a point inside that pad or via, vN(x,y) a via of type N, cw(c..) or ccw(c..) an arc to the next point about the centre after c; other vN are vias at no path point)
1v2a: C30.2 IC8.4 L2.2 | length 4.5
  Top Layer w0.254: IC8.4@12.656,33.732 12.656,35.022 13.379,35.745 13.379,36.317 13.533,36.471 13.533,36.571 13.883,36.921 13.983,36.921 L2.2@14.456,37.394
1v2d: C19.2 C20.2 C21.2 C22.2 IC8.13 IC8.22 IC8.31 IC8.45 L1.2 L2.1 | length 30.4
  Top Layer w0.254: C20.2@5.506,27.694 5.556,27.744 IC8.22@7.168,27.744 8.14,27.744 8.39,27.994 8.406,27.994 ; C21.2@11.606,23.494 11.606,23.794 11.656,23.844 IC8.31@11.656,25.256 11.656,26.544 ; 14.235,30.284 14.407,30.284 14.629,30.507 14.629,30.509 14.842,30.721 15.621,30.721 IC8.45@15.644,30.744 ; IC8.45@15.659,30.73 17.233,30.73 C22.2@17.506,31.003
  Top Layer w0.4: L1.2@3.622,36.844 3.822,36.844 4.222,36.444 4.222,35.579 5.006,34.794 5.306,34.794 5.603,34.498 5.603,33.829 6.674,32.757 IC8.13@6.674,32.294 ; L1.2@3.806,36.844 v1(3.806,38.094) ; IC8.13@7.216,32.292 8.408,32.292 ; v1(14.106,38.237) 14.106,39.744 L2.1@14.306,39.944
  Bottom Layer w0.4: v1(3.806,38.094) 3.86,38.094 3.96,37.994 13.006,37.994 13.211,38.199 14.068,38.199 v1(14.106,38.237)
1v2o: C18.2 IC8.14 L1.1 | length 4.6
  Top Layer w0.254: C18.2@5.506,32.394 5.506,32.344 5.779,32.071 5.928,32.071 6.029,32.071 6.333,31.767 7.145,31.767 IC8.14@7.168,31.744
  Top Layer w0.4: L1.1@3.706,33.944 4.105,33.545 4.655,33.545 5.306,32.894 5.306,32.594 C18.2@5.506,32.394
3v3: C12.2 C14.2 C15.2 IC6.31 IC6.42 IC7.2 IC8.24 IC8.36 L3.1 R1.2 R3.2 | length 17.7
  Top Layer w0.254: v1(5.506,25.494) C14.2@5.506,26.494 5.756,26.744 IC8.24@7.168,26.744 ; v1(8.274,21.961) 9.523,21.961 R3.2@9.606,22.044 ; IC8.36@14.156,25.256 14.156,25.271 14.179,25.294 C15.2@17.306,25.294 ; v1(16.406,25.894) 16.472,25.828 16.822,25.828 C15.2@17.306,25.344 ; R1.2@19.056,38.694 IC7.2@19.056,40.294 ; v1(20.006,28.094) 20.1,28.094 20.25,28.244 IC6.42@21.518,28.244 ; v1(20.117,34.047) 20.21,34.047 20.49,33.767 21.495,33.767 IC6.31@21.518,33.744
  Top Layer w0.5: L3.1@11.906,41.444 13.429,41.444 13.479,41.494 v1(13.506,41.494) ; v1(17.006,39.544) C12.2@17.006,40.394 17.031,40.369 IC7.2@18.851,40.369 ; IC7.2@18.856,40.344 19.006,40.344 IC7.2@19.056,40.294
3v3a: C16.2 C17.2 C23.2 C24.2 IC8.8 IC8.15 L3.2 T1.2 T1.7 | length 56.7
  Top Layer w0.254: C17.2@5.506,31.194 5.556,31.244 IC8.15@7.168,31.244 8.627,31.244 9.477,30.394 v1(9.506,30.394) ; v1(10.451,32.197) 10.451,32.291 10.656,32.496 IC8.8@10.656,33.732 10.679,33.755 10.679,34.534 10.891,34.747 11.256,34.747 ; C16.2@11.256,35.594 11.256,34.747 ; L3.2@11.906,38.544 12.137,38.313 12.137,35.036 11.847,34.747 11.615,34.747 11.256,34.747
  Top Layer w0.4: v1(10.606,38.894) 11.556,38.894 L3.2@11.906,38.544 ; v1(34.011,38.887) 34.049,38.926 34.404,38.926 34.724,39.245 34.724,39.765 C24.2@34.914,39.954 36.576,39.954 37.16,39.37 v1(39.37,39.37) ; C23.2@38.775,31.648 38.975,31.848 38.975,32.15 v1@39.447,32.622
  Bottom Layer w0.4: v1(10.606,38.894) 10.609,38.891 34.007,38.891 v1(34.011,38.887) ; T1.2@37.449,32.995 39.096,32.995 v1(39.469,32.622) 39.469,32.676 40.03,33.237 40.03,38.71 v1(39.37,39.37) 39.357,39.357 37.461,39.357 T1.7@37.449,39.345
5V: C1.1 C2.1 C3.2 C4.2 C5.2 C6.2 C7.2 C8.2 C9.2 C10.2 C11.2 C40.2 IC1.20 IC2.8 IC3.20 IC4.6 IC4.16 IC5.14 IC6.7 IC6.18 IC7.3 IC9.6 IC9.16 IC11.16 IC12.5 PL5_SK13.17 PL6_SK15.12 R19.2 | length 40.3
  Top Layer w0.254: IC6.7@29.094,28.244 29.117,28.221 30.335,28.221 30.989,27.566 31.31,27.566 C8.2@31.572,27.305 ; IC6.18@29.094,33.744 29.117,33.767 29.825,33.767 30.179,33.767 30.206,33.794 C9.2@30.806,33.794 ; R19.2@29.335,38.762 29.41,38.762 30.126,39.478 30.412,39.478 v1(30.478,39.544) ; C9.2@31.05,34.087 31.186,34.223 v1(31.186,34.918) ; C8.2@31.572,27.268 C8.2@31.572,27.305 ; v1(31.572,28.143) C8.2@31.572,27.305 ; C8.2@31.583,27.28 31.583,27.293 C8.2@31.572,27.305 ; C10.2@44.475,26.874 44.501,26.901 C10.2@44.501,26.928 ; C10.2@44.475,26.901 C10.2@44.501,26.928 ; v1(44.501,27.965) C10.2@44.501,26.928 ; IC9.16@46.005,27.174 44.748,27.174 C10.2@44.501,26.928 ; IC4.6@47.18,30.549 47.199,30.53 47.199,29.382 v1(47.219,29.362) ; IC9.6@52.355,21.724 52.365,21.734 52.365,23.664 v1(52.375,23.674) ; v1(56.236,37.44) 56.236,36.513 C5.2@56.275,36.474 57.753,36.474 IC5.14@57.765,36.486 ; IC2.8@74.325,32.624 C7.2@74.325,34.066 ; C7.2@74.575,34.274 74.675,34.174 v1(75.675,34.174) ; IC12.5@83.581,11.105 83.581,10.866 83.754,10.693 v1(84.353,10.693) ; v1(86.593,14.927) C40.2@87.913,14.927 ; IC11.16@87.909,13.291 87.909,14.924 C40.2@87.913,14.927 ; C40.2@87.997,15.011 C40.2@87.913,14.927 ; IC3.20@92.392,18.937 v1(95.695,18.937)
  Top Layer w0.4: IC7.3@21.021,41.292 21.088,41.359 22.796,41.359 C11.2@22.806,41.369 ; C11.2@22.77,41.405 C11.2@22.806,41.369 ; v1(23.768,41.332) 22.843,41.332 C11.2@22.806,41.369 ; v1(38.864,34.647) 38.902,34.685 38.902,35.232 C4.2@39.027,35.357 ; C4.2@39.201,35.509 40.68,35.509 40.83,35.659 IC4.16@40.83,35.999 ; IC1.20@43.348,12.187 45.587,12.187 C6.2@45.712,12.062 45.855,12.205 46.799,12.205 v1(46.838,12.243)
  Top Layer w0.5: C2.1@23.926,18.745 v1(26.365,18.745) ; C1.1@63.054,23.52 v1(65.38,23.52)
12V: 
-5V: 
/BL: PL6_SK15.2
/ECON: 
/EFIQ: PL5_SK13.1
/IOGT: PL6_SK15.4
/IORQ: IC11.1 PL6_SK15.3 | length 62
  Top Layer w0.254: PL6_SK15.3@37.821,6.121 39.142,7.443 61.746,7.443 v1(62.459,6.731) ; v1(64.922,6.782) 67.335,4.369 88.735,4.369 91.092,6.726 91.092,8.715 90.914,8.893 88.536,8.893 87.909,8.266 IC11.1@87.909,7.841
  Bottom Layer w0.254: v1(62.459,6.731) 62.484,6.756 64.897,6.756 v1(64.922,6.782)
/MS: PL6_SK15.8
/PFIQ: 
/PIRQ: PL6_SK15.11 Q2.3 R19.1 | length 68.5
  Top Layer w0.254: R19.1@29.103,40.359 28.532,40.359 28.032,39.859 ; R19.1@29.335,40.262 29.41,40.262 29.708,40.56 29.708,40.635 32.532,43.459 43.664,43.459 43.704,43.42 54.929,43.42 v1(54.966,43.383) ; 28.032,39.859 Q2.3@27.473,39.301 27.6,39.301 28.032,39.732 28.032,39.859
  Bottom Layer w0.254: v1(54.966,43.383) 58.141,40.208 PL6_SK15.11@58.141,6.121
/PRE_IORD: IC2.32 IC6.17 PL6_SK15.9 | length 94.4
  Top Layer w0.254: IC6.17@29.094,33.244 30.091,33.244 31.61,31.725 34.341,31.725 35.86,33.244 40.818,33.244 41.544,33.97 41.544,34.179 v1(41.61,34.245) ; v1@41.61,34.17 60.25,34.17 62.243,32.178 62.243,30.019 77.825,14.437 IC2.32@77.825,12.924
  Bottom Layer w0.254: v1@41.631,34.214 41.631,29.848 42.543,28.936 42.543,26.152 45.263,23.432 45.263,21.485 46.853,19.895 47.097,19.895 47.403,19.59 47.403,19.552 53.061,13.894 PL6_SK15.9@53.061,6.121
/PS: IC1.19 IC4.5 IC5.2 IC11.15 | length 92.8
  Top Layer w0.254: v1(41.859,28.804) 41.457,29.206 41.457,31.423 42.698,32.664 45.91,32.664 ; IC1.19@42.078,12.663 42.044,12.629 42.044,10.28 43.669,8.655 79.458,8.655 82.994,12.192 88.825,12.192 88.974,12.341 88.974,13.086 IC11.15@89.179,13.291 ; IC1.19@42.083,12.719 42.108,12.744 42.108,15.184 v1(42.139,15.215) ; IC4.5@45.91,30.549 45.91,32.664 ; IC5.2@59.035,31.062 58.837,31.26 58.837,31.953 58.125,32.664 45.91,32.664
  Bottom Layer w0.254: v1(41.859,28.804) 41.859,28.71 42.139,28.431 v1(42.139,15.215)
/PWE_IOWR: IC2.7 IC5.4 IC6.16 PL6_SK15.1 | length 94.8
  Top Layer w0.254: PL6_SK15.1@32.741,6.121 36.322,9.703 37.059,9.703 38.87,11.514 38.87,13.752 38.119,14.503 33.931,14.503 26.365,22.069 26.365,31.013 26.945,31.594 26.949,31.594 28.076,32.721 29.071,32.721 IC6.16@29.094,32.744 30.019,32.744 31.521,31.242 35.726,31.242 36.234,30.734 39.37,30.734 42.108,33.472 60.377,33.472 61.492,32.357 IC5.4@61.492,31.062 ; IC5.4@61.575,31.062 61.772,30.865 61.772,29.668 v1(64.11,27.33) ; v1(72.723,27.252) 72.816,27.252 74.825,29.26 IC2.7@74.825,32.624
  Bottom Layer w0.254: v1(64.11,27.33) 64.149,27.291 72.683,27.291 v1(72.723,27.252)
/RST: IC5.12 IC5.13 PL5_SK13.15 | length 44
  Top Layer w0.254: IC5.13@59.035,36.486 59.22,36.672 59.22,37.63 59.411,37.821 v1(60.325,37.821) 60.315,37.81 60.315,36.497 IC5.12@60.305,36.486
  Bottom Layer w0.254: v1(60.325,37.821) 60.325,13.106 70.206,3.226 PL5_SK13.15@70.206,1.676
/RST_Buf: IC3.1 IC5.11 IC6.19 | length 75.4
  Top Layer w0.254: IC6.19@29.094,34.244 27.959,34.244 27.81,34.393 27.81,37.149 27.959,37.298 29.921,37.298 30.875,38.252 38.202,38.252 38.415,38.039 40.675,38.039 41.478,37.236 50.495,37.236 52.427,35.305 61.523,35.305 61.575,35.356 ; IC5.11@61.575,36.486 61.575,35.356 ; IC3.1@92.455,28.309 92.429,28.335 92.429,29.516 86.332,35.613 73.742,35.613 73.435,35.307 61.624,35.307 61.575,35.356
/S2: PL5_SK13.3
/S6: 
/S7: 
/WBE: PL5_SK13.2
BD0: IC1.11 PL5_SK13.7 | length 31
  Top Layer w0.254: IC1.11@31.918,12.638 31.918,10.988 29.312,8.382 29.312,4.496 30.951,2.857 48.705,2.857 PL5_SK13.7@49.886,1.676
BD1: IC1.12 PL5_SK13.8 | length 33.4
  Top Layer w0.254: IC1.12@33.188,12.663 33.01,12.485 33.01,11.509 29.716,8.215 29.716,4.663 31.118,3.261 50.841,3.261 PL5_SK13.8@52.426,1.676
BD2: IC1.13 PL5_SK13.9 | length 36.2
  Top Layer w0.254: IC1.13@34.458,12.663 34.289,12.494 34.289,11.5 34.14,11.351 33.424,11.351 30.12,8.047 30.12,4.83 31.285,3.665 52.977,3.665 PL5_SK13.9@54.966,1.676
BD3: IC1.14 PL5_SK13.10 | length 39.3
  Top Layer w0.254: IC1.14@35.728,12.663 35.728,11.191 35.484,10.947 33.591,10.947 30.524,7.88 30.524,4.998 31.453,4.069 55.113,4.069 PL5_SK13.10@57.506,1.676
BD4: IC1.15 PL5_SK13.11 | length 42
  Top Layer w0.254: IC1.15@36.998,12.663 36.998,11.394 36.147,10.543 33.758,10.543 30.928,7.713 30.928,5.165 31.62,4.473 57.249,4.473 PL5_SK13.11@60.046,1.676
BD5: IC1.16 PL5_SK13.12 | length 44.7
  Top Layer w0.254: IC1.16@38.268,12.663 38.091,12.486 38.091,11.307 36.924,10.139 33.926,10.139 31.332,7.545 31.332,5.333 31.787,4.877 59.385,4.877 PL5_SK13.12@62.586,1.676
BD6: IC1.17 PL5_SK13.13 | length 32.8
  Top Layer w0.254: IC1.17@39.538,12.663 39.624,12.576 39.624,11.455 43.232,7.847 62.447,7.847 65.126,5.169 PL5_SK13.13@65.126,1.676
BD7: IC1.18 PL5_SK13.14 | length 33.4
  Top Layer w0.254: IC1.18@40.808,12.663 40.894,12.576 40.894,10.77 43.412,8.251 62.614,8.251 67.666,3.2 PL5_SK13.14@67.666,1.676
BD8: 
BD9: 
BD10: 
BD11: 
BD12: 
BD13: 
BD14: 
BD15: 
C0_IDT: 
C1_ICK: 
CLK2: PL5_SK13.4
CLK8: 
D0: IC1.9 IC2.21 IC3.18 IC6.2 | length 77.5
  Top Layer w0.254: IC6.2@29.094,25.744 29.117,25.721 29.905,25.721 30.422,25.204 33.039,25.204 33.188,25.055 IC1.9@33.188,22.113 33.188,19.721 35.535,17.374 38.811,17.374 40.393,15.792 70.6,15.792 72.325,14.067 72.325,10.962 74.227,9.059 79.29,9.059 86.193,15.962 88.278,15.962 89.915,17.599 IC3.18@89.915,18.859